# Altium PCB hotair.PcbDoc
Units mm, origin at the board's own origin, x right, y up, seen from the top; angles counter-clockwise.
Board outline 72.5 x 62 mm, 2 copper layers (Top Layer, Bottom Layer), stack 1.571 mm thick; 71 components, 50 nets, 194 pads, 2 vias.
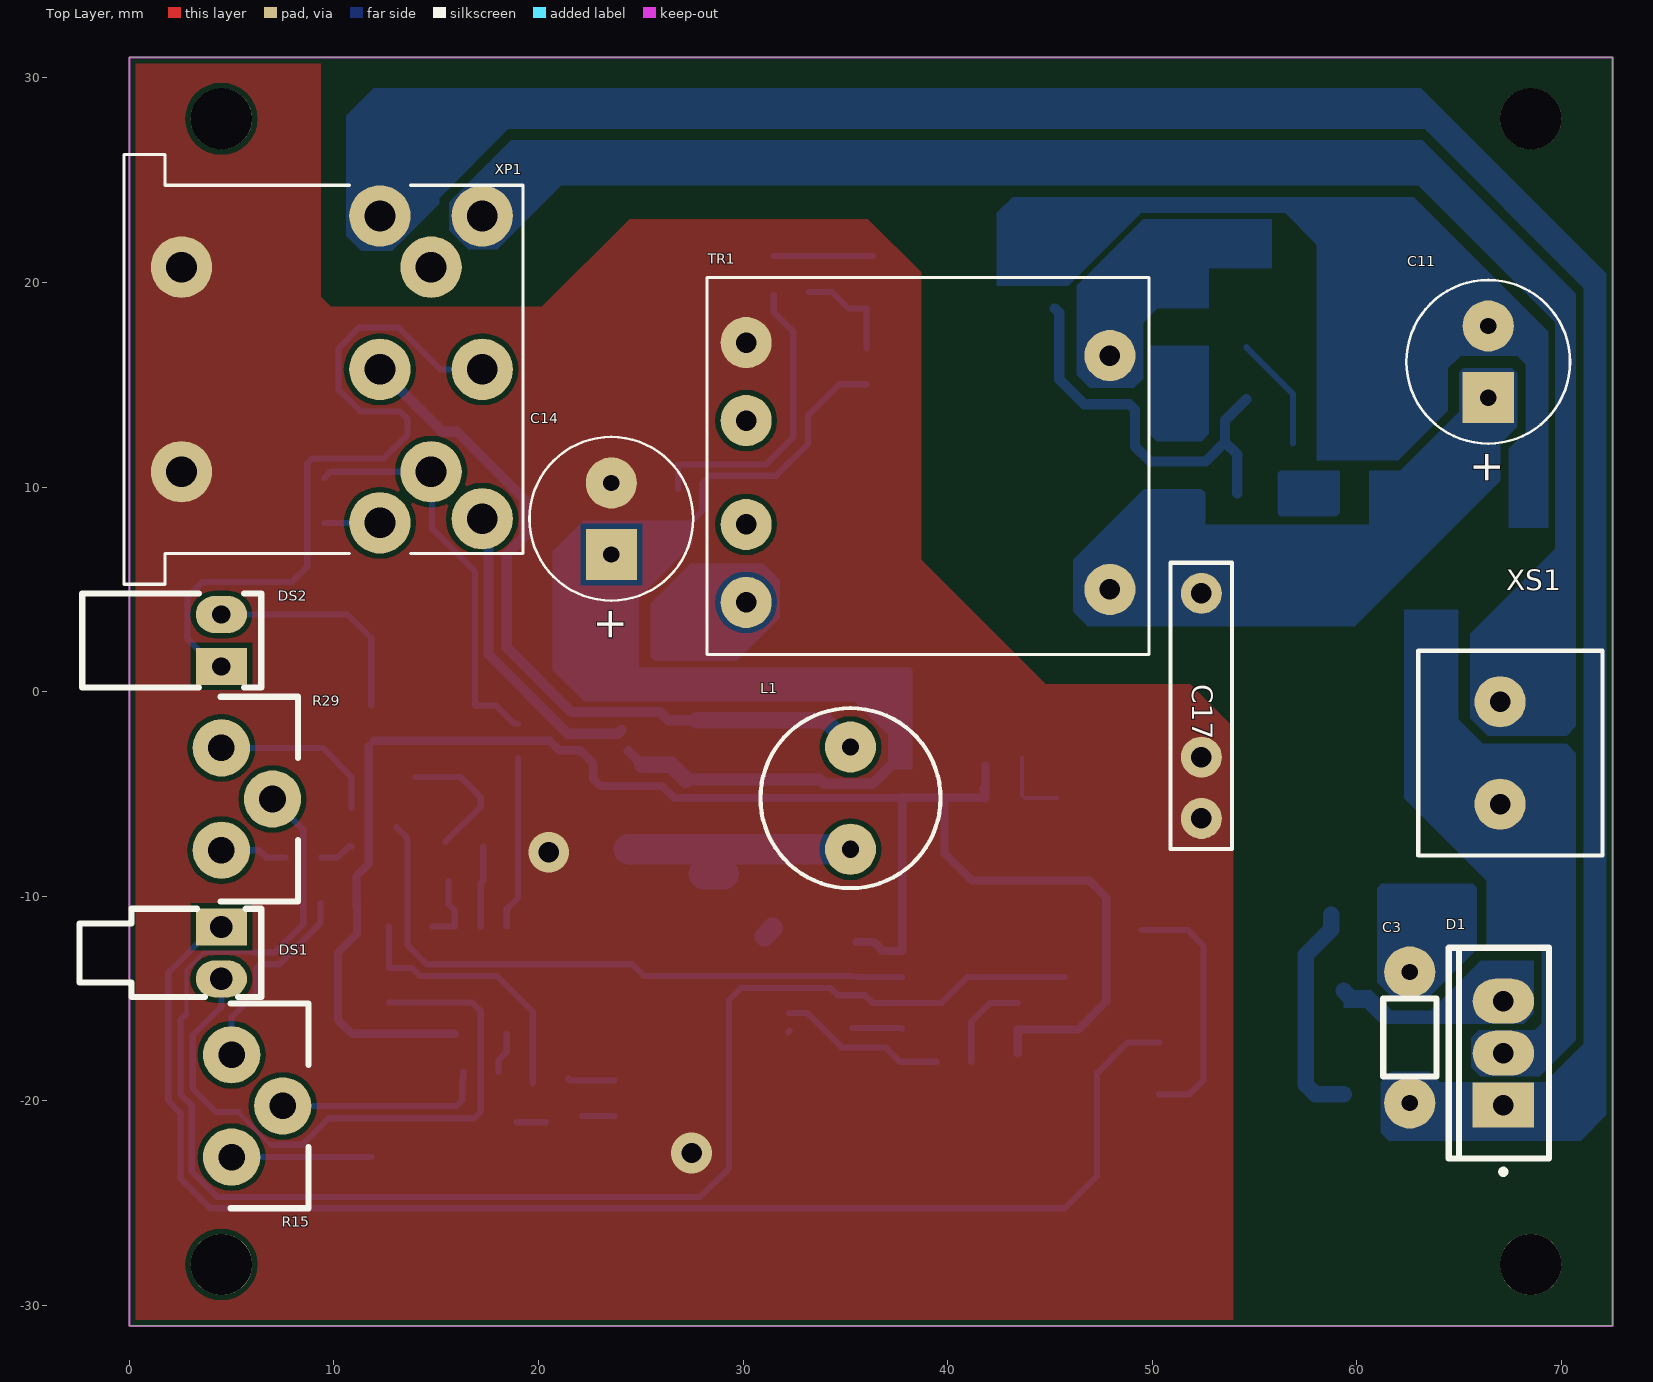
[diagram p0: Top Layer view]
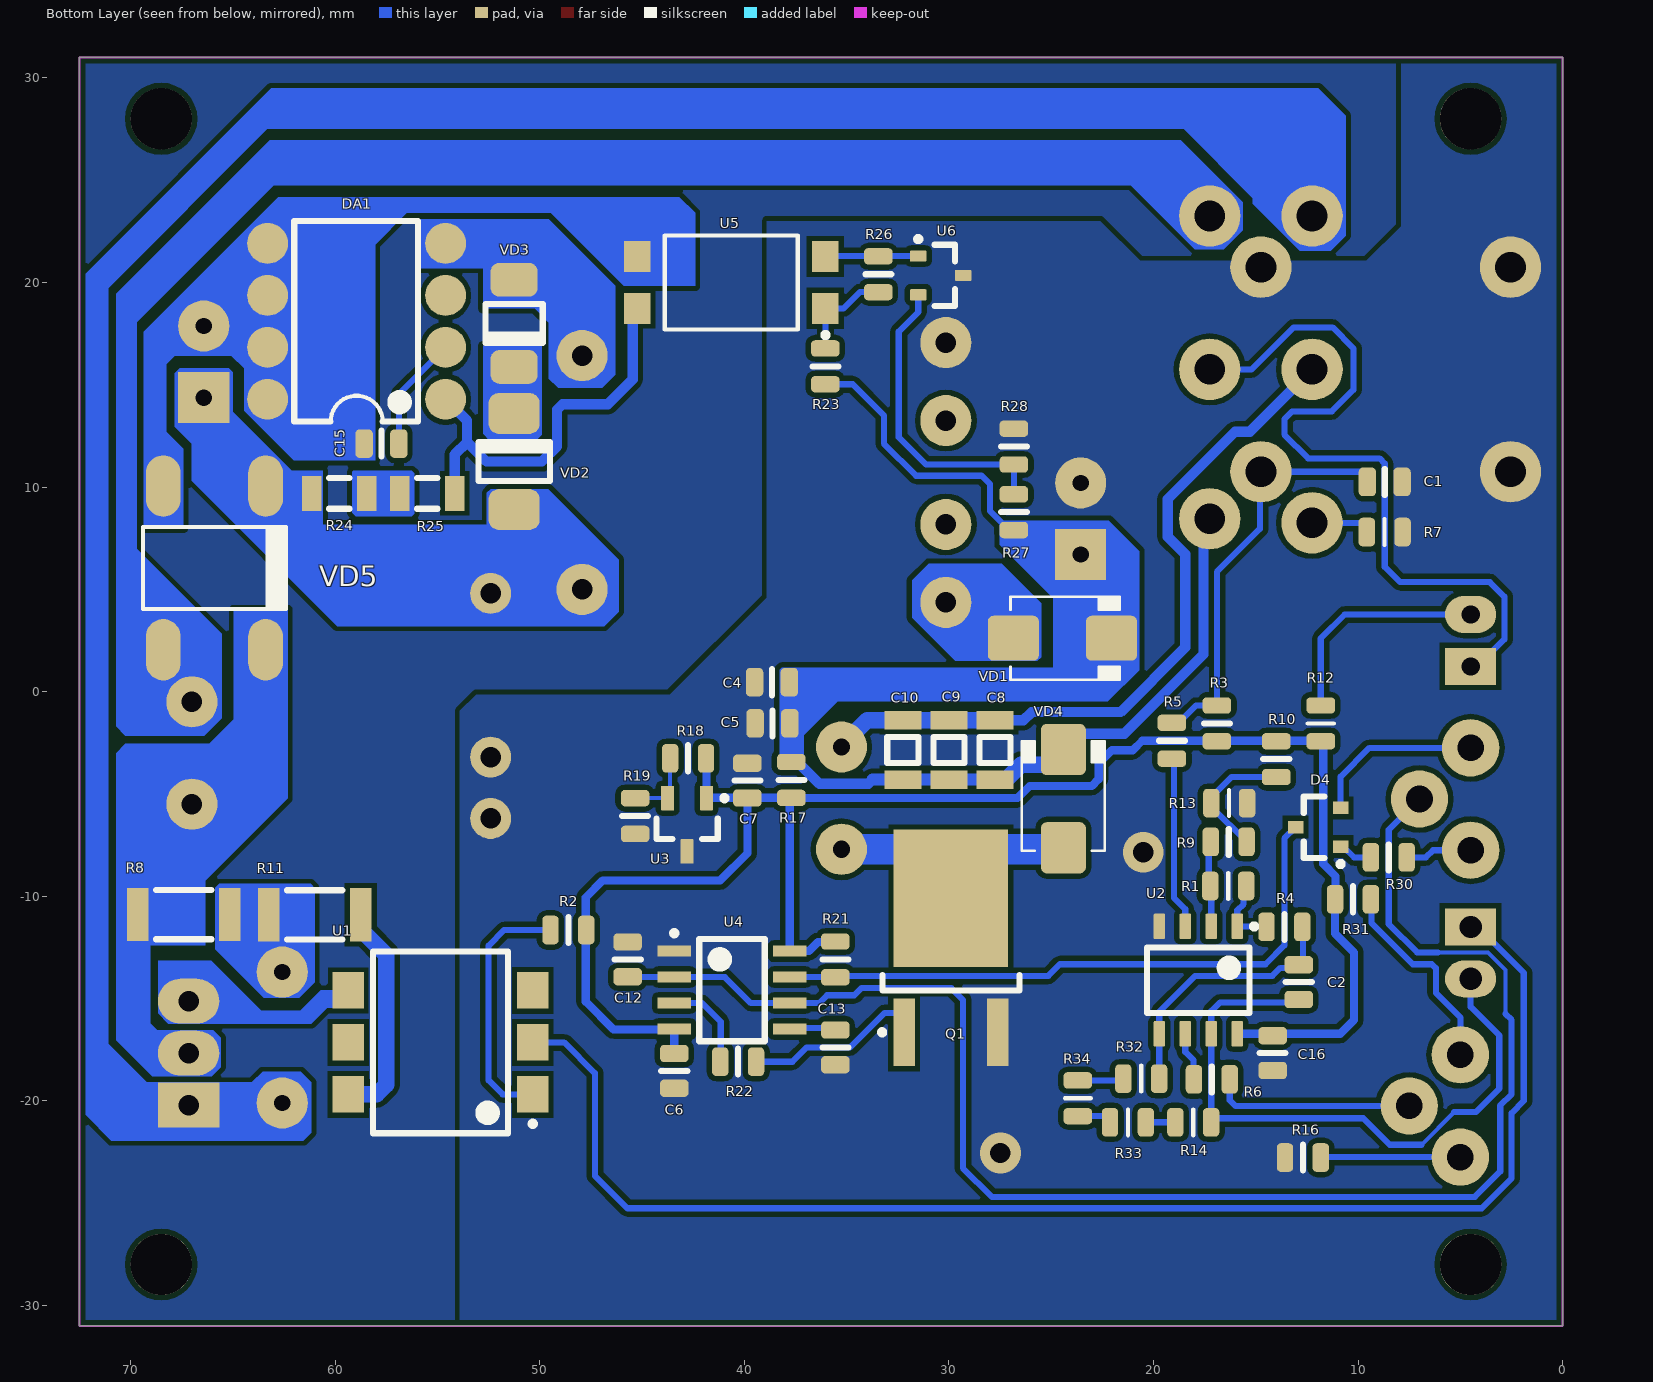
[diagram p1: Bottom Layer view, seen from below]
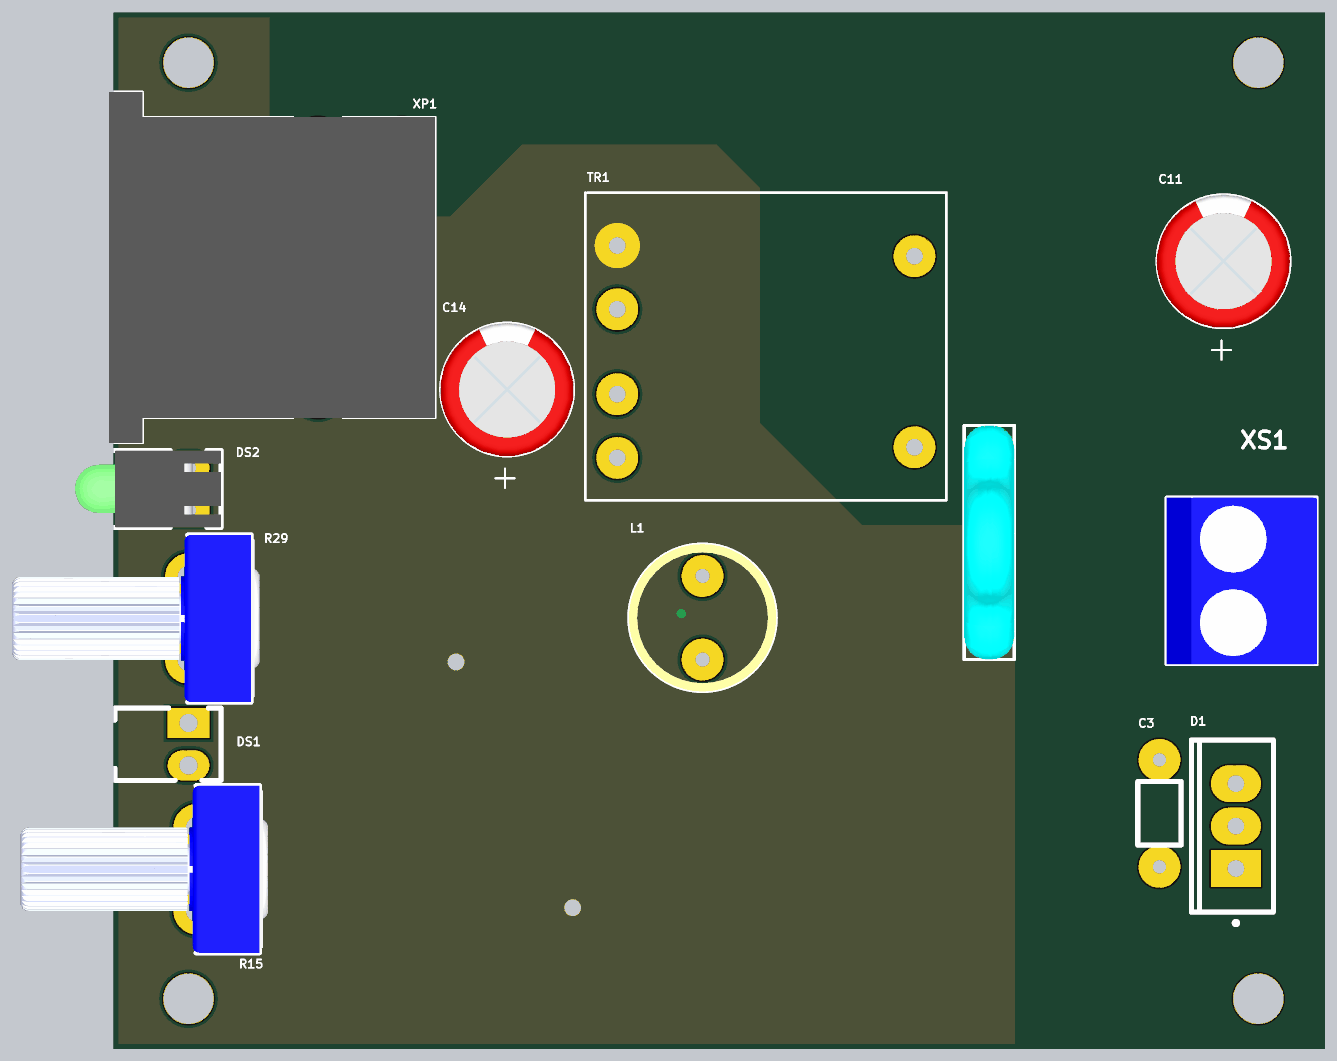
[diagram p2: 3D render of the assembled board from above, using the file's embedded part models]
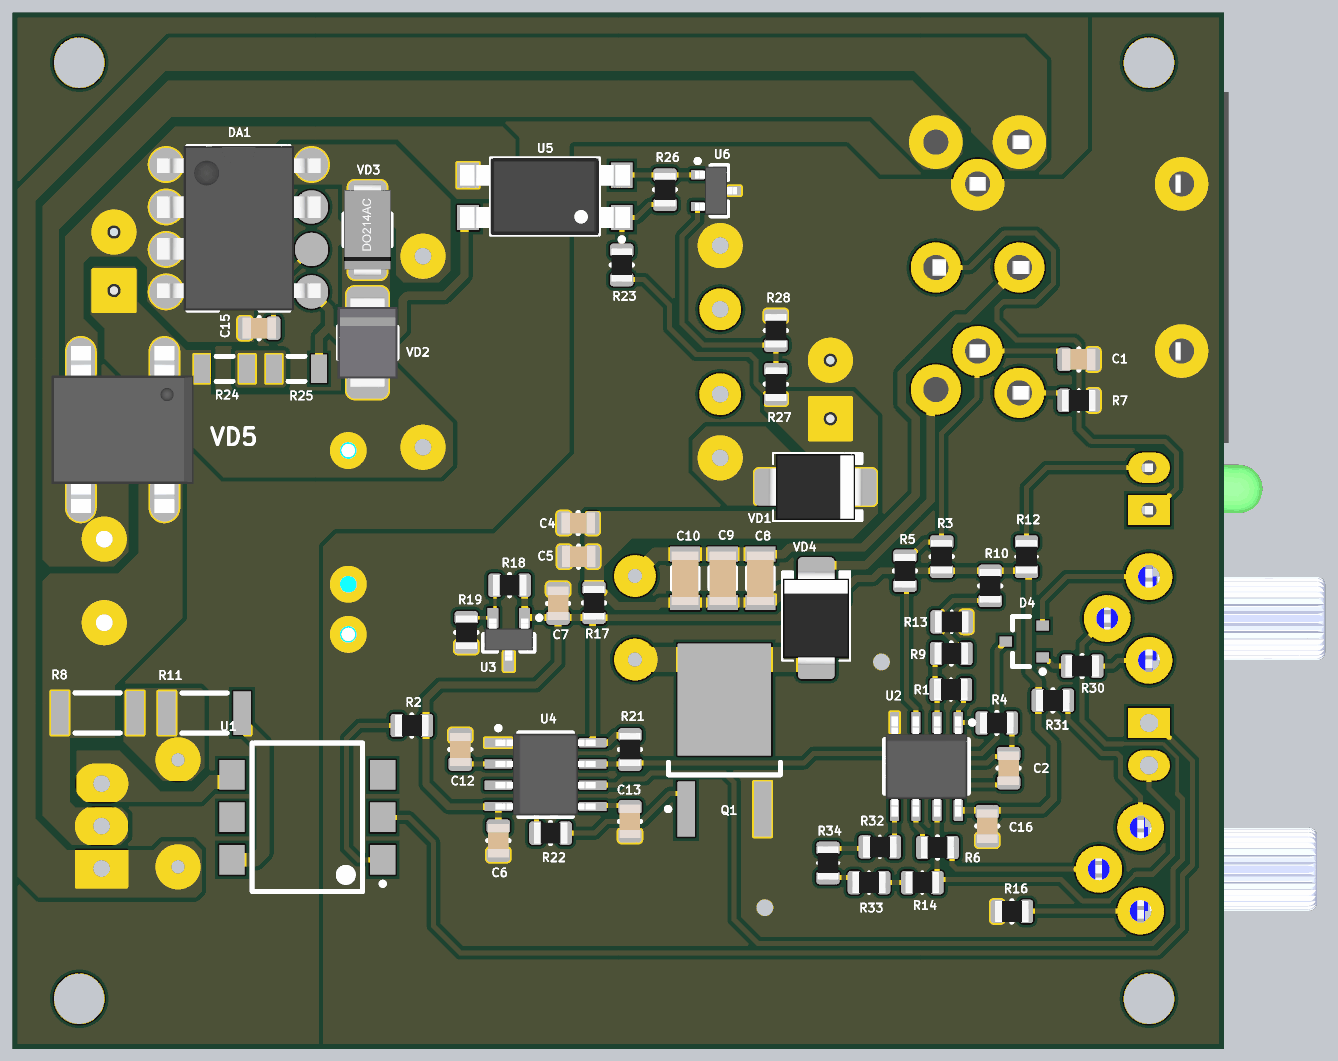
[diagram p3: 3D render of the assembled board from below, using the file's embedded part models]

## Layer stack, top to bottom
Top Solder: solder mask 0.0102, Solder Resist, Dk 3.5
Top Layer: signal copper 0.0356
Dielectric 1: dielectric 1.5, FR-4, Dk 4.8
Bottom Layer: signal copper 0.0356
Bottom Solder: solder mask 0.0102, Solder Resist, Dk 3.5

## Board outline
0,-31 0,31 72.5,31 72.5,-31

## Design rules (kind name [scope] priority, off if disabled: settings)
Clearance Clearance_1 [IsRegion] p1: gap=0.25 ignorepadtopadclearanceinfootprint=FALSE
Clearance [All] p2: gap=0.25 ignorepadtopadclearanceinfootprint=FALSE
PolygonConnect PolygonConnect_1 [IsVia] p1: connectstyle=Direct reliefconductorwidth=0.254 reliefentries=4 polygonreliefangle="90 Angle" airgapwidth=0.254
PolygonConnect [All] p2: connectstyle=Direct reliefconductorwidth=0.35 reliefentries=4 polygonreliefangle="90 Angle" airgapwidth=0.25
RoutingVias [All] p1: holewidth=0.711 width=1.27 viastyle="Through Hole" minholewidth=0.711 minwidth=1.27 maxholewidth=0.711 maxwidth=1.27
SolderMaskExpansion [All] p1: expansion=0.102
Width [All] p1: maxlimit=2 minlimit=0.2 preferedwidth=0.3
30 further rules are at their usual default settings.

## Components (designator, comment, footprint, x,y, rotation, side; value= is the part's Value field where it differs from the comment)
C1 "100nF" CAP0805R 8.7,10.25 r0 bottom
C2 "100nF" CAP0805R 12.9,-14.2 r90 bottom
C3 "A104M15X7RF5TAA" CAPA55-380X260 62.587,-16.907 r90 top
C4 "10uF" CAP0805R 38.649,0.461 r180 bottom
C5 "10uF" CAP0805R 38.624,-1.55 r180 bottom
C6 "10uF" CAP0805R 43.424,-18.538 r90 bottom
C7 "10uF" CAP0805R 39.85,-4.35 r270 bottom
C8 "10uF" CAP1206R 27.747,-2.85 r270 bottom
C9 "10uF" CAP1206R 30,-2.85 r270 bottom
C10 "10uF" CAP1206R 32.25,-2.854 r270 bottom
C11 "400 Vdc, 4.7 uF" WCAP-ATG8_8x11.5x3.5 66.42,16.12 r270 top value="4.7 uF"
C12 "220pF" CAP0805R 45.7,-13.088 r90 bottom
C13 "10nF" CAP0805R 35.55,-17.388 r270 bottom
C14 "10 Vdc, 560 uF" WCAP-ATG8_8x11.5x3.5 23.56,8.45 r270 top value="560 uF"
C15 "100nF" CAP0805R 57.734,12.12 r180 bottom
C16 "10uF" CAP0805R 14.175,-17.668 r90 bottom
C17 "Y Capacitor" CAP_Y 52.4,-0.7 r90 top value=2.2n
D1 "BTB12-600CW3G" ONSC-TO-220-3-221A-07 67.159,-17.669 r180 top
D4 "BAV99" INF-SOT23_L 11.955,-6.629 r0 bottom
DA1 "TNY279GN" SMDIP8 58.95,18.1 r0 bottom
DS1 "551-1307F" DIAL-LED-551-2_V 4.5,-12.77 r270 top
DS2 "WP934CB/GD" KING-WP934CBGD_V 4.5,2.5 r90 top
L1 "RFB0807-470L" COIL-RFB0807-2_V 35.25,-5.206 r90 top
Q1 "IRFR3708PBF" INTR-TO-252AA-3_M 29.9,-12.5 r90 bottom
R1 "499K" RES0805R 16.347,-9.5 r0 bottom value=499k
R2 "1K" RES0805R 48.6,-11.65 r0 bottom value=1k
R3 "68K" RES0805R 16.9,-1.55 r270 bottom value=68k
R4 "100K" RES0805R 13.6,-11.5 r0 bottom value=100k
R5 "2K2" RES0805R 19.1,-2.4 r90 bottom value=2k2
R6 "100K" RES0805R 17.15,-18.95 r0 bottom value=100k
R7 "51" RES0805R 8.7,7.8 r180 bottom
R8 "360R" RESC2010(5025)_L 67.4,-10.9 r0 bottom value="360.00 Ohm"
R9 "2K2" RES0805R 16.325,-7.342 r0 bottom value=2k2
R10 "68k" RES0805R 14,-3.3 r90 bottom
R11 "360R" RESC2010(5025)_L 61,-10.907 r0 bottom value="360.00 Ohm"
R12 "10K" RES0805R 11.825,-1.55 r270 bottom value=10k
R13 "51" RES0805R 16.3,-5.45 r0 bottom
R14 "1M" RES0805R 18.059,-21.05 r180 bottom
R15 "100k" CA9MH 6.25,-20.25 r270 top
R16 "2K2" RES0805R 12.7,-22.773 r180 bottom value=2k2
R17 "510" RES0805R 37.7,-4.315 r270 bottom
R18 "22K" RES0805R 42.75,-3.257 r180 bottom value=22k
R19 "10K" RES0805R 45.339,-6.08 r90 bottom value=10k
R21 "91K" RES0805R 35.55,-13.088 r90 bottom value=91k
R22 "100" RES0805R 40.3,-18.088 r180 bottom
R23 "1k" RES0805R 36.039,15.9 r90 bottom
R24 "2M" RESC1206(3216)_L 59.8,9.688 r180 bottom value="2000000.00 Ohm"
R25 "2M" RESC1206(3216)_L 55.5,9.688 r180 bottom value="2000000.00 Ohm"
R26 "1K" RES0805R 33.45,20.4 r270 bottom value=1k
R27 "22K" RES0805R 26.823,8.771 r270 bottom value=22k
R28 "3K3" RES0805R 26.823,11.976 r270 bottom value=3k3
R29 "100k" CA9MH 5.75,-5.25 r270 top
R30 "10K" RES0805R 8.5,-8.1 r180 bottom value=10k
R31 "6k2" RES0805R 10.25,-10.15 r0 bottom
R32 "1M" RES0805R 20.6,-18.917 r180 bottom
R33 "1M" RES0805R 21.25,-21.05 r0 bottom
R34 "1M" RES0805R 23.7,-19.877 r90 bottom
TR1 "V50110" V50110 47.93,4.995 r180 top
U1 "MOC3063SM" "FAIR-MDIP 6L-N06C_V" 54.85,-17.143 r0 bottom
U2 "LM358DR" D0008A_L 17.811,-14.101 r270 bottom
U3 "TL431AQDBZRQ1" DBZ0003A_M 42.8,-6.507 r270 bottom
U4 "NE555DR" D0008A_M 40.6,-14.588 r180 bottom
U5 "FOD817DSD" FAIR-MDIP-4_V 40.639,20 r0 bottom
U6 "TL431ACDBZR" DBZ0003A_L 30.4,20.342 r180 bottom
VD1 "10BQ100" DO-214AA 24.45,2.61 r180 bottom
VD2 "SM6T200CA" SMB 51.25,11.25 r270 bottom
VD3 "US1M" SMA 51.25,18 r90 bottom
VD4 "10BQ100" DO-214AA 24.407,-5.232 r90 bottom
VD5 "DF10S" DF-S 65.9,6.048 r270 bottom
XP1 "KDJ01-8" KDJ01-8 -0.25,15.75 r90 top
XS1 "DG306-021-12" DG306 67,-3 r270 top

## Footprints (in the part's own frame and the unit in brackets; to place one, negate y for a bottom-side part, rotate by r counter-clockwise, add the part's x,y. Pads: shape width x height; smd on the part's side, far side on the other; paste and mask are expansions set on the pad)
CA9MH [mm]
  round 2.8 hole 1.3: 1(-2.5,-1.25) 2(0,1.25) 3(2.5,-1.25)
  silkscreen extent -5,-1.3 5,2.5, body extent -5,-11.8 5,3, height 11.82
CAP0805R [mm] "capacitor 0805 reflow soldering"
  rrect50% 0.85x1.4 smd: 1(-0.85,0) 2(0.85,0)
  silkscreen extent 0,-0.64 0,0.64, body extent -1,-0.62 1,0.63, height 0.61
CAP1206R [mm] "capacitor 1206 reflow soldering"
  rect 0.9x1.8 smd: 1(-1.45,0) 2(1.45,0)
  silkscreen extent -0.64,-0.76 0.64,0.76, body extent -1.6,-0.8 1.6,0.8, height 0.79
CAP_Y [mm]
  round 2 hole 1 unplated: 1(-5.5,0) 2(5.5,0)
  silkscreen extent -7,-1.5 7,1.5, body extent -7,-1.5 7,1.5, height 9.5
CAPA55-380X260 [mm] "THD, 2-Leads, Dia 2.6mm, Body Length 3.8mm"
  round 2.5 hole 0.8: 1(-3.2,0) 2(3.2,0)
  silkscreen extent -1.9,-1.3 1.9,1.3, body extent -1.9,-1.3 1.9,1.3, height 2.6
COIL-RFB0807-2_V [mm] "Radial Leaded, 2-Leads, Dia 8.8mm, Height 7.5mm, Pin Spacing 5mm"
  round 2.5 hole 0.85: 1(-2.5,0) 2(2.5,0)
  silkscreen extent -4.4,-4.4 4.4,4.4, body extent -4.41,-4.41 4.41,4.41, height 7.5
D0008A_L [mm] "SOIC, 8-Leads, Body 5x4mm, Pitch 1.27mm, IPC High Density"
  rrect18% 1.25x0.55 smd: 1(-2.625,1.905) 2(-2.625,0.635) 3(-2.625,-0.635) 4(-2.625,-1.905) 5(2.625,-1.905) 6(2.625,-0.635) 7(2.625,0.635) 8(2.625,1.905)
  silkscreen extent -2.75,-2.5 1.6,2.85, body extent -3,-2.45 3,2.45, height 1.63
D0008A_M [mm] "SOIC, 8-Leads, Body 5x4mm, Pitch 1.27mm, IPC Low Density"
  rrect15% 1.65x0.55 smd: 1(-2.825,1.905) 2(-2.825,0.635) 3(-2.825,-0.635) 4(-2.825,-1.905) 5(2.825,-1.905) 6(2.825,-0.635) 7(2.825,0.635) 8(2.825,1.905)
  silkscreen extent -2.95,-2.5 1.6,2.9, body extent -3,-2.45 3,2.45, height 1.63
DBZ0003A_L [mm] "SOT23, 3-Leads, Body 3.04x1.4mm, Pitch 0.95mm, IPC High Density"
  rrect18% 0.8x0.55 smd: 1(-1.1,0.95) 2(-1.1,-0.95) 3(1.1,0)
  silkscreen extent -1.23,-1.5 0.7,1.9, body extent -1.26,-1.46 1.26,1.46, height 0.96
DBZ0003A_M [mm] "SOT23, 3-Leads, Body 3.04x1.4mm, Pitch 0.95mm, IPC Low Density"
  rrect15% 1.2x0.65 smd: 1(-1.3,0.95) 2(-1.3,-0.95) 3(1.3,0)
  silkscreen extent -1.42,-1.5 0.7,1.95, body extent -1.26,-1.46 1.26,1.46, height 0.96
DF-S [mm]
  oval 3x1.7 smd: 1(-4,2.5) 2(-4,-2.5) 3(4,-2.5) 4(4,2.5)
  silkscreen extent -2,-3.5 2,3.5, body extent -5,-4.25 5,4.25, height 3.65
DG306 [mm]
  round 2.5 hole 1 unplated: 1(-2.5,0) 2(2.5,0)
  silkscreen extent -5,-4 5,5, body extent -5,-4 5,5, height 12.62
DIAL-LED-551-2_V [mm] "LED, 2-Leads, Body 8.89x4.32mm, Pitch 2.54mm"
  rect 1.8x2.5 hole 1.09: 1(-1.27,0)
  oval 1.8x2.5 hole 1.09: 2(1.27,0)
  silkscreen extent -2.16,-6.94 2.16,1.95, body extent -2.16,-6.94 2.16,1.95, height 7.11
DO-214AA [mm] "JEDEC DO214 variation AA. SMB"
  round 0.508 on Mech15: 0(0,0)
  rrect25% 2.5x2.2 smd: A(-2.4,0) K(2.4,0)
  silkscreen extent -2.54,-2.03 2.79,2.03, body extent -2.8,-1.97 2.8,1.98, height 2.62
"FAIR-MDIP 6L-N06C_V" [mm] "SOP, 6-Leads, Body 8.51x6.35mm, Pitch 2.54mm"
  rect 1.52x1.78 smd: 1(-4.51,2.54) 2(-4.51,0) 3(-4.51,-2.54) 4(4.51,-2.54) 5(4.51,0) 6(4.51,2.54)
  silkscreen extent -4.63,-4.44 3.3,4.45, body extent -3.17,-4.26 3.17,4.26, height 5.08
FAIR-MDIP-4_V [mm] "SMD, 4-Leads, Body 6.5x4.6mm, Pitch 2.54mm"
  rect 1.3x1.5 smd: 1(-4.6,1.27) 2(-4.6,-1.27) 3(4.6,-1.27) 4(4.6,1.27)
  silkscreen extent -4.72,-2.3 3.25,2.69, body extent -5.08,-2.3 5.08,2.3, height 3.85
INF-SOT23_L [mm] "SOT23, 3-Leads, Body 2.9x1.3 mm, Pitch 0.95 mm, IPC High Density"
  rect 0.75x0.6 smd: 1(-1.1,0.95) 2(-1.1,-0.95) 3(1.1,0)
  silkscreen extent -1.22,-1.5 0.7,1.92, body extent -0.7,-1.5 0.7,1.5, height 1.1
INTR-TO-252AA-3_M [mm] "DPAK, 3-Leads, Body 6.75x6.22mm, Pitch 2.29mm, IPC Low Density"
  rect 3.3x1.05 smd: 1(-4.15,2.29) 3(-4.15,-2.29)
  rect 6.7x5.6 smd: 4(2.4,0)
  silkscreen extent -4.27,-3.35 -1.35,3.49, body extent -2.1,-3.37 4.12,3.37, height 2.39
KDJ01-8 [mm]
  round 3 hole 1.5: 1(-7.3,-17.5) 2(-7.5,-12.5) 3(-5,-15) 4(0,-12.5) 5(5,-15) 6(7.5,-12.5) 7(7.5,-17.5) 8(0,-17.5) 9(-5,-2.8) 10(5,-2.8)
  silkscreen extent -10.5,-19.5 10.5,0, body extent -10.5,-19.5 10.5,0, height 19.51
KING-WP934CBGD_V [mm] "THD, 2-Leads, Body 4.6x8.75mm"
  rect 1.8x2.5 hole 0.9: 1(-1.27,0)
  oval 1.8x2.5 hole 0.9: 2(1.27,0)
  silkscreen extent -2.3,-1.95 2.3,6.8, body extent -2.3,-1.95 2.3,6.8, height 7.3
ONSC-TO-220-3-221A-07 [mm] "FM, 3-Leads, Body 10.3x4.85mm, Pitch 2.54mm"
  rect 3x2.2 hole 1: 1(0,2.54)
  oval 3x2.2 hole 1: 2(0,0) 3(0,-2.54)
  silkscreen extent -2.23,-5.15 2.67,5.92, body extent -2.21,-5.15 2.64,5.15, height 19.68
RES0805R [mm] "resistor 0805 reflow soldering"
  rrect50% 0.8x1.4 smd: 1(-0.875,0) 2(0.875,0)
  silkscreen extent 0,-0.64 0,0.64, body extent -1,-0.62 1,0.63, height 0.61
RESC1206(3216)_L [mm] "Chip Resistor, Body 3.2x1.6mm, IPC High Density"
  rect 0.95x1.7 smd: 1(-1.35,0) 2(1.35,0)
  silkscreen extent -0.5,-0.75 0.5,0.75, body extent -1.67,-0.87 1.67,0.87, height 0.75
RESC2010(5025)_L [mm] "Chip Resistor, Body 5.0x2.5mm, IPC High Density"
  rect 1.05x2.6 smd: 1(-2.25,0) 2(2.25,0)
  silkscreen extent -1.35,-1.2 1.35,1.2, body extent -2.6,-1.35 2.6,1.35, height 0.71
SMA [mm]
  rrect50% 1.65x2.3 smd: A(2.13,0) K(-2.13,0)
  silkscreen extent -0.95,-1.4 0.95,1.4, body extent -2.74,-1.4 2.74,1.4, height 2.3
SMB [mm]
  rrect50% 2x2.5 smd: A(2.35,0) K(-2.35,0)
  silkscreen extent -0.95,-1.75 0.95,1.75, body extent -2.7,-1.8 2.7,1.8, height 2.32
SMDIP8 [mm]
  round 2 smd: 1(-4.35,3.81) 2(-4.35,1.27) 3(-4.35,-1.27) 4(-4.35,-3.81) 5(4.35,-3.81) 6(4.35,-1.27) 7(4.35,1.27) 8(4.35,3.81)
  silkscreen extent -3,-4.9 3.05,4.91, body extent -4.9,-4.93 4.9,4.92, height 4.02
V50110 [mm]
  round 2.5 hole 1: 1(0,0) 4(0,-11.43) 5(17.78,-12.065) 6(17.78,-8.255) 7(17.78,-3.175) 8(17.78,0.635)
  silkscreen extent -1.91,-15.24 19.69,3.18
WCAP-ATG8_8x11.5x3.5 [mm] "Aluminum Electrolytic Capacitors, 8x11.5mm"
  rect 2.5x2.5 hole 0.8: 1(1.75,0)
  round 2.5 hole 0.8: 2(-1.75,0)
  silkscreen extent -4,-4 4,4, body extent -3.99,-4 4,4, height 11.81

## Part data
C1 C2 C15: library part CC0805_100NF_50V_10%_X7R, Case=0805, Manufacturer=GENERIC, Manufacturer1 ComponentHeight=1.35mm, Manufacturer1 Example=EPCOS, Manufacturer1 Part Number=B37941K5104K62, Manufacturer Part Number 2=CC0805KPX7R9BB104, Tolerance=±10%, Voltage=50V, Author="I. Kuznetsov", Component Type=Standard, CreateDate=03.12.2007, HelpURL=\\cern.ch\dfs\Applications\Altium\Datasheets\CC0805_X7R_EPCOS.pdf, LatestRevisionDate=03.12.2007, Manufacturer Part Number=CC0805_100NF_50V_10%_X7R, Mounted=Yes, Part Description="SMD Multilayer Chip Ceramic Capacitor", Part Number=CC0805_100NF_50V_10%_X7R, Pin Count=2, SMD=Yes, Socket=No, Status=Preferred, Table="Capacitors SMD", TC=X7R
C3: library part CMP-2000-05716-1, "Axial Leaded Multilayer Ceramic Capacitor for General Purpose, 50 VDC, 100 nF, +/- 20%, -55 to 125 degC, 2-Pin THD, RoHS, Tape and Reel", Capacitance=0.1µF, Manufacturer=Vishay, Operating Temperature=-55°C~125°C, Package / Case=Axial, Package Description="2-Pin Axial Lead, Dia 2.6 mm, Body Length 3.8 mm", Package Reference=CAPA55-380X260, Ratings=-, Standard Package=7,000, Temperature Coefficient=X7R, Tolerance=±20%, Voltage - Rated=50V, Applications=GeneralPurpose, Category=Capacitors, Datasheet URL=http://www.vishay.com/docs/45164/aseries.pdf, Datasheet Version=08/2013, Family=CeramicCapacitors, Features=-, Height - Seated (Max)=-, Lead Spacing=-, Lead Style=-, Manufacturer URL=http://www.vishay.com/, Mounting Technology=ThroughHole, Mounting Type=ThroughHole, Packaging=Tape&Reel(TR), Series=A, Size / Dimension="0.098\"Diax0.150\"L(2.50mmx3.80mm)", Thickness (Max)=-
C4 C5 C6 C7 C16: library part CC0805_10UF_25V_10%_X5R, Case=0805, Manufacturer=GENERIC, Manufacturer1 ComponentHeight=1.4mm, Manufacturer1 Example=TDK, Manufacturer1 Part Number=C2012X5R1E106K125AB, Manufacturer Part Number 2=CC0805KKX5R8BB106, Tolerance=±10%, Voltage=25V, Author="I. Kuznetsov", Component Type=Standard, CreateDate=25.10.2012, HelpURL=\\cern.ch\dfs\Applications\Altium\Datasheets\CC0805_X5R_TDK_C.pdf, LatestRevisionDate=25.10.2012, Manufacturer Part Number=CC0805_10UF_25V_10%_X5R, Mounted=Yes, Part Description="SMD Multilayer Chip Ceramic Capacitor", Part Number=CC0805_10UF_25V_10%_X5R, Pin Count=2, SMD=Yes, Socket=No, Status=Preferred, Table="Capacitors SMD", TC=X5R
C8 C9 C10: library part CC1206_10UF_10V_10%_X7R, Case=1206, Manufacturer=GENERIC, Manufacturer1 ComponentHeight=1.8mm, Manufacturer1 Example=KEMET, Manufacturer1 Part Number=C1206C106K8RAC, Manufacturer Part Number=CC1206_10uF_10V_10%_X7R, Manufacturer Part Number 2=CC1206KKX7R6BB106, Tolerance=±10%, Voltage=10V, Author="I. Kuznetsov", Component Type=Standard, CreateDate=03.12.2007, HelpURL=\\cern.ch\dfs\Applications\Altium\Datasheets\CC1206_X7R_KEMET.pdf, LatestRevisionDate=03.12.2007, Mounted=Yes, Part Description="SMD Multilayer Chip Ceramic Capacitor", Part Number=CC1206_10UF_10V_10%_X7R, Pin Count=2, SMD=Yes, Socket=No, Status=Preferred, Table="Capacitors SMD", TC=X7R
C11: library part 860011374005, "WCAP-ATG8 Aluminum Electrolytic Capacitors, 8x11.5mm, 400 Vdc, 4.7 uF", Operating Temperature="-25 °C up to +85 °C", Rated Voltage="400 Vdc", ComponentLink1Description=Manufacturer, ComponentLink1URL=http://www.we-online.de, ComponentLink2Description=Datasheet, ComponentLink2URL=http://katalog.we-online.de/pbs/datasheet/860011374005.pdf, Life Cycle=2000h, Part Number=860011374005, Published Date="Sep. 2017", Publisher="Wurth Elektronik", Size=8x11.5mm
C12: library part CC0805_220PF_50V_5%_NP0, Case=0805, Manufacturer=GENERIC, Manufacturer1 ComponentHeight=1.30mm, Manufacturer1 Example=EPCOS, Manufacturer1 Part Number=B37940K5221J060, Manufacturer Part Number 2=CC0805JRNPO9BN221, Tolerance=±5%, Voltage=50V, Author="I. Kuznetsov", Component Type=Standard, CreateDate=03.12.2007, HelpURL=\\cern.ch\dfs\Applications\Altium\Datasheets\CC0805_NP0_EPCOS.pdf, LatestRevisionDate=03.12.2007, Manufacturer Part Number=CC0805_220PF_50V_5%_NP0, Mounted=Yes, Part Description="SMD Multilayer Chip Ceramic Capacitor", Part Number=CC0805_220PF_50V_5%_NP0, Pin Count=2, SMD=Yes, Socket=No, Status=Preferred, Table="Capacitors SMD", TC=NP0
C13: library part CC0805_10NF_250V_10%_X7R, Case=0805, Manufacturer=GENERIC, Manufacturer1 ComponentHeight=0.88mm, Manufacturer1 Example=KEMET, Manufacturer1 Part Number=C0805C103KARACTU, Manufacturer Part Number 2=CC0805KKX7RYBB103, Tolerance=±10%, Voltage=250V, Author="I. Kuznetsov", Component Type=Standard, CreateDate=24.06.2013, HelpURL=\\cern.ch\dfs\Applications\Altium\Datasheets\CC0805_X7R_KEMET.pdf, LatestRevisionDate=24.06.2013, Manufacturer Part Number=CC0805_10NF_250V_10%_X7R, Mounted=Yes, Part Description="SMD Multilayer Chip Ceramic Capacitor", Part Number=CC0805_10NF_250V_10%_X7R, Pin Count=2, SMD=Yes, Socket=No, Status=None, Table="Capacitors SMD", TC=X7R
C14: library part 860010274012, "WCAP-ATG8 Aluminum Electrolytic Capacitors, 8x11.5mm, 10 Vdc, 560 uF", Operating Temperature="-40 °C up to +85 °C", Rated Voltage="10 Vdc", ComponentLink1Description=Manufacturer, ComponentLink1URL=http://www.we-online.de, ComponentLink2Description=Datasheet, ComponentLink2URL=http://katalog.we-online.de/pbs/datasheet/860010274012.pdf, Life Cycle=2000h, Part Number=860010274012, Published Date="Sep. 2017", Publisher="Wurth Elektronik", Size=8x11.5mm
C17: library part CAP_Y, PartNumber="Y Film Capacitor", Voltage=1000V
D1: library part CMP-1070-00036-1, "Triacs, Silicon Bidirectional Thyristor, 3-Pin TO-220, Pb-Free, Tube", Manufacturer="On Semiconductor", ComponentLink1Description="Manufacturer URL", ComponentLink1URL=http://www.onsemi.com/, ComponentLink2Description=Datasheet, ComponentLink2URL=http://www.onsemi.com/pub_link/Collateral/BTB12-600CW3-D.PDF, ComponentLink3Description="Package Specification", ComponentLink3URL=http://www.onsemi.com/pub_link/Collateral/221A-07.PDF, DatasheetVersion="Rev. 1", IGT Max (mA)=35, IT(RMS) Max (A)=12, ITSM Max (A)=120, Mounting Technology="Through Hole", PackageDescription="3-Pin Flange Mount, Vertical Straight Lead, Body 9.97 x 4.445 mm, Pitch 2.54 mm", PackageReference=TO-220-3-221A-07, PackageVersion="Rev. O, 07/2008", Packing=Tube, PartNumber=BTB12-600CW3G, RoHS=Pb-Free
D4: library part CMP-1176-00014-1, "Silicon Switching Diode, SOT23, Reel, Green", Manufacturer=Infineon, ComponentLink1Description="Manufacturer URL", ComponentLink1URL=http://www.infineon.com/, ComponentLink2Description=Datasheet, ComponentLink2URL=http://www.infineon.com/dgdl/bav99series.pdf?folderId=db3a30431400ef6801141b5844e103ea&fileId=db3a30431400ef6801141c1b237d042f, ComponentLink3Description="Package Specification", ComponentLink3URL=http://www.infineon.com/dgdl/smbta14_mmbta14.pdf?folderId=db3a30431441fb5d011445c30f210183&fileId=db3a30431441fb5d011445ef0201018c, Green=TRUE, Mounting Technology="Surface Mount", PackageDescription="3-Pin Small Outline Transistor Package, 1.3 x 2.9 mm Body, 0.95 mm Pitch", PackageReference=SOT23, PackageVersion=Apr-08, Packing=Reel, PartNumber=BAV99, RevisionNote="Re-Activated Devices"
DS1: library part CMP-2000-05095-1, "3mm LED Circuit Board Indicator .200' High LED Centerline, GREEN, 1.9 V, 2 mA, 2-Pin THD, RoHS, Bulk", Emitting Color=YellowGreen, Forward Current=7mA, Forward Voltage=2.2V, Manufacturer=Dialight, Operating Temperature Classification=Industrial, Operating Temp Range=-55Cto100C, Power Dissipation=20W, Reverse Voltage=5V, Test Current (It)=2mA, Datasheet URL=http://datasheet.octopart.com/551-1307F-Dialight-datasheet-2832.pdf, Datasheet Version=Jul-02, DELETED=Compliant, High Brightness=No, Lens Dimensions=2.89x2.89x2.54mm, Lens Type=Diffused, Luminous Intensity=1.6mcd, Lum Intensity=1.6mcd, Main Category=StandardLED, Manufacturer URL=http://www.dialight.com, Mounting=ThroughHole, Number of Elements=1, Packaging=Bulk, Peak Wavelength=565nm, Pin Count=2, Product Depth (mm)=4.32mm, Product Height (mm)=7.11mm, Product Length (mm)=8.89mm, Rad Hardened=No, Shape Type=Circular, Type=Uni-Color, Viewing Angle=60deg
DS2: library part CMP-2000-07417-1, "Right Angle LED Indicator, 62.5 mW, 25 mA, -40 to 85 degC, 2-Pin THD, RoHS, Bulk", Color=Green, Current=20mA, Manufacturer=Kingbright, Millicandela Rating=22.5mcd, Package Description="2-Pin Through Hole Device, Body 4.6 x 8.75 mm", Package Reference=WP934CBGD, Standard Package=500, Voltage Rating=2.2V, 3D Model="WP934CB/x.sldprt /  / WP934CB/x.pro /  / WP934CB/x.igs /  / WP934CB/x.stp", Catalog Drawings="WP934CBSeriesFront /  / WP934CBSeriesSide", Category=Optoelectronics, Configuration=Single, Datasheet URL=http://www.kingbrightusa.com/images/catalog/SPEC/WP934CB-GD.pdf, Datasheet Version="Rev. 10B, 09/2016", Dynamic Catalog=SingleLevel3mm(T1)SingleColorRightAngleLEDs, Family=LEDs-CircuitBoardIndicators,Arrays,LightBars,BarGraphs, Lens Style/Size=RoundwithDomedTop,3mm, Lens Type=Diffused,Tinted, Manufacturer URL=http://www.kingbright.com/, Minimum Quantity=Green, Mounting Technology=ThroughHole, Mounting Type=ThroughHole,RightAngle, Other Names="754-1297 / WP934CBGD", Packaging=Bulk, Quantity Available=Bulk, Viewing Angle=40°, Wavelength - Peak=568nm
L1: library part CMP-0924-00047-1, "Power Inductor, 47 uH +/- 10%, 1.45 A, -40 to 125 degC, 2-Pin Radial Leaded, Dia 8.8 mm, RoHS, Tray", Ambient Temperature Range="-40 to 125 degC", Inductance="47 uH", Manufacturer=Coilcraft, Tolerance="+/- 10%", ComponentLink1Description="Manufacturer URL", ComponentLink1URL=http://www.coilcraft.com/, ComponentLink2Description=Datasheet, ComponentLink2URL=http://www.coilcraft.com/pdfs/rfb.pdf, DatasheetVersion=Sep-13, DCR="0.19 Ohm Max.", Irms Rise (20 degC)="1.3 A", Irms Rise (40 degC)="1.85 A", Isat="1.45 A", Mounting Technology="Through Hole", PackageDescription="2-Pin Radial Leaded, Dia 8.8 mm, Height 7.5 mm, Pin Spacing 5 mm", PackageReference=RFB0807-2, Packing=Tray, PartNumber=RFB0807-470L, RoHS=TRUE, SRF="12 MHz Typ."
Q1: library part CMP-2000-05156-1, "Mosfet N-Channel, 30 V, 61 A, -55 to 175 degC, 3-Pin DPAK, RoHS, Tube", Alternate Case Style=D-PAK, Continuous Drain Current Id=61A, Drain Source Voltage Vds=30V, Junction to Case Thermal Resistance A=1.73degC/W, Manufacturer="International Rectifier", On Resistance Rds(on)=13mohm, On State resistance @ Vgs = 10V=12.5mohm, Operating Temperature Max=175degC, Operating Temperature Min=-55degC, Operating Temperature Range=-55degCto+175degC, Package / Case=DPAK, Package Description="3-Pin Surface Mount Device, Body 6.54 x 6.095 mm, Pitch 2.29 mm", Package Reference=TO-252AA-3, Power Dissipation Pd=87W, Pulse Current Idm=244A, Rds(on) Test Voltage Vgs=10V, Threshold Voltage Vgs Typ=2V, Transistor Case Style=TO-252, Current Id Max=61A, Datasheet URL=http://www.irf.com/product-info/datasheets/data/irfr3708pbf.pdf, Datasheet Version=Dec-04, Manufacturer URL=http://internationalrectifier.com/, MSL=–, No. of Pins=3, SVHC=NoSVHC(19-Dec-2012), Transistor Polarity=NChannel, Voltage Vds Typ=30V, Voltage Vgs Max=2V, Voltage Vgs Rds on Measurement=10V
R1: library part R0805_499K_0.1%_0.125W_25PPM, Case=0805, Manufacturer=GENERIC, Manufacturer1 ComponentHeight=0.6mm, Manufacturer1 Example=PANASONIC, Manufacturer1 Part Number=ERA6AEB4993V, Power=0.125W, Tolerance=±0.1%, Author="CERN DEM JLC", Component Type=Standard, CreateDate=20.06.2011, HelpURL=\\cern.ch\dfs\Applications\Altium\Datasheets\R0805_PANASONIC_ERA.pdf, LatestRevisionDate=20.06.2011, Manufacturer Part Number=R0805_499K_0.1%_0.125W_25PPM, Mounted=Yes, PackageDescription=Standard, Part Description="Thin Film Chip Resistor", Part Number=R0805_499K_0.1%_0.125W_25PPM, Pin Count=2, SMD=Yes, Socket=No, Status="Not recommended", Table="Resistors SMD", TC=±25ppm
R2 R23 R26: library part R0805_1K_1%_0.125W_100PPM, Case=0805, Manufacturer=GENERIC, Manufacturer1 ComponentHeight=0.6mm, Manufacturer1 Example="NIC COMPONENT", Manufacturer1 Part Number=NRC10F1001TRF, Power=0.125W, Tolerance=±1%, Author="CERN DEM JLC", Component Type=Standard, CreateDate=03.12.2007, HelpURL=\\cern.ch\dfs\Applications\Altium\Datasheets\R0805_NIC_NRC.pdf, LatestRevisionDate=13.03.2008, Manufacturer Part Number=R0805_1K_1%_0.125W_100PPM, Mounted=Yes, PackageDescription=Standard, Part Description="General Purpose Thick Film Chip Resistor", Part Number=R0805_1K_1%_0.125W_100PPM, Pin Count=2, SMD=Yes, Socket=No, Status=Preferred, Table="Resistors SMD", TC=±100ppm/°C
R3 R10: library part R0805_68K_1%_0.125W_100PPM, Case=0805, Manufacturer=GENERIC, Manufacturer1 ComponentHeight=0.6mm, Manufacturer1 Example="NIC COMPONENT", Manufacturer1 Part Number=NRC10F6802TRF, Power=0.125W, Tolerance=±1%, Author="CERN DEM JLC", Component Type=Standard, CreateDate=03.12.2007, HelpURL=\\cern.ch\dfs\Applications\Altium\Datasheets\R0805_NIC_NRC.pdf, LatestRevisionDate=13.03.2008, Manufacturer Part Number=R0805_68K_1%_0.125W_100PPM, Mounted=Yes, PackageDescription=Standard, Part Description="General Purpose Thick Film Chip Resistor", Part Number=R0805_68K_1%_0.125W_100PPM, Pin Count=2, SMD=Yes, Socket=No, Status=Preferred, Table="Resistors SMD", TC=±100ppm/°C
R4 R6: library part R0805_100K_1%_0.125W_100PPM, Case=0805, Manufacturer=GENERIC, Manufacturer1 ComponentHeight=0.6mm, Manufacturer1 Example="NIC COMPONENT", Manufacturer1 Part Number=NRC10F1003TRF, Power=0.125W, Tolerance=±1%, Author="CERN DEM JLC", Component Type=Standard, CreateDate=03.12.2007, HelpURL=\\cern.ch\dfs\Applications\Altium\Datasheets\R0805_NIC_NRC.pdf, LatestRevisionDate=13.03.2008, Manufacturer Part Number=R0805_100K_1%_0.125W_100PPM, Mounted=Yes, PackageDescription=Standard, Part Description="General Purpose Thick Film Chip Resistor", Part Number=R0805_100K_1%_0.125W_100PPM, Pin Count=2, SMD=Yes, Socket=No, Status=Preferred, Table="Resistors SMD", TC=±100ppm/°C
R5 R9 R16: library part R0805_2K2_1%_0.125W_100PPM, Case=0805, Manufacturer=GENERIC, Manufacturer1 ComponentHeight=0.6mm, Manufacturer1 Example="NIC COMPONENT", Manufacturer1 Part Number=NRC10F2201TRF, Power=0.125W, Tolerance=±1%, Author="CERN DEM JLC", Component Type=Standard, CreateDate=03.12.2007, HelpURL=\\cern.ch\dfs\Applications\Altium\Datasheets\R0805_NIC_NRC.pdf, LatestRevisionDate=13.03.2008, Manufacturer Part Number=R0805_2K2_1%_0.125W_100PPM, Mounted=Yes, PackageDescription=Standard, Part Description="General Purpose Thick Film Chip Resistor", Part Number=R0805_2K2_1%_0.125W_100PPM, Pin Count=2, SMD=Yes, Socket=No, Status=Preferred, Table="Resistors SMD", TC=±100ppm/°C
R7 R13: library part R0805_51R_1%_0.125W_100PPM, Case=0805, Manufacturer=GENERIC, Manufacturer1 ComponentHeight=0.6mm, Manufacturer1 Example="NIC COMPONENT", Manufacturer1 Part Number=NRC10F51R0TRF, Power=0.125W, Tolerance=±1%, Author="CERN DEM JLC", Component Type=Standard, CreateDate=03.12.2007, HelpURL=\\cern.ch\dfs\Applications\Altium\Datasheets\R0805_NIC_NRC.pdf, LatestRevisionDate=13.03.2008, Manufacturer Part Number=R0805_51R_1%_0.125W_100PPM, Mounted=Yes, PackageDescription=Standard, Part Description="General Purpose Thick Film Chip Resistor", Part Number=R0805_51R_1%_0.125W_100PPM, Pin Count=2, SMD=Yes, Socket=No, Status=Preferred, Table="Resistors SMD", TC=±100ppm/°C
R8 R11: library part CMP-1017-00459-1, "360R 0.75W 1% 2010 (5025 Metric)  SMD", Case-EIA=2010, Case-Metric=5025, Power="0.75 W", Tolerance="1 %", Technology=SMT
R12 R19 R30: library part R0805_10K_1%_0.125W_100PPM, Case=0805, Manufacturer=GENERIC, Manufacturer1 ComponentHeight=0.6mm, Manufacturer1 Example="NIC COMPONENT", Manufacturer1 Part Number=NRC10F1002TRF, Power=0.125W, Tolerance=±1%, Author="CERN DEM JLC", Component Type=Standard, CreateDate=03.12.2007, HelpURL=\\cern.ch\dfs\Applications\Altium\Datasheets\R0805_NIC_NRC.pdf, LatestRevisionDate=13.03.2008, Manufacturer Part Number=R0805_10K_1%_0.125W_100PPM, Mounted=Yes, PackageDescription=Standard, Part Description="General Purpose Thick Film Chip Resistor", Part Number=R0805_10K_1%_0.125W_100PPM, Pin Count=2, SMD=Yes, Socket=No, Status=Preferred, Table="Resistors SMD", TC=±100ppm/°C
R14 R32 R33 R34: library part R0805_1M_1%_0.125W_100PPM, Case=0805, Manufacturer=GENERIC, Manufacturer1 ComponentHeight=0.6mm, Manufacturer1 Example="NIC COMPONENT", Manufacturer1 Part Number=NRC10F1004TRF, Power=0.125W, Tolerance=±1%, Author="CERN DEM JLC", Component Type=Standard, CreateDate=03.12.2007, HelpURL=\\cern.ch\dfs\Applications\Altium\Datasheets\R0805_NIC_NRC.pdf, LatestRevisionDate=13.03.2008, Manufacturer Part Number=R0805_1M_1%_0.125W_100PPM, Mounted=Yes, PackageDescription=Standard, Part Description="General Purpose Thick Film Chip Resistor", Part Number=R0805_1M_1%_0.125W_100PPM, Pin Count=2, SMD=Yes, Socket=No, Status=Preferred, Table="Resistors SMD", TC=±100ppm/°C
R15 R29: library part CA9MH, Component Type=Standard, Part Number=CA9MH, Pin Count=3
R17: library part R0805_510R_1%_0.125W_100PPM, Case=0805, Manufacturer=GENERIC, Manufacturer1 ComponentHeight=0.6mm, Manufacturer1 Example="NIC COMPONENT", Manufacturer1 Part Number=NRC10F5100TRF, Power=0.125W, Tolerance=±1%, Author="CERN DEM JLC", Component Type=Standard, CreateDate=03.12.2007, HelpURL=\\cern.ch\dfs\Applications\Altium\Datasheets\R0805_NIC_NRC.pdf, LatestRevisionDate=13.03.2008, Manufacturer Part Number=R0805_510R_1%_0.125W_100PPM, Mounted=Yes, PackageDescription=Standard, Part Description="General Purpose Thick Film Chip Resistor", Part Number=R0805_510R_1%_0.125W_100PPM, Pin Count=2, SMD=Yes, Socket=No, Status=Preferred, Table="Resistors SMD", TC=±100ppm/°C
R18 R27: library part R0805_22K_1%_0.125W_100PPM, Case=0805, Manufacturer=GENERIC, Manufacturer1 ComponentHeight=0.6mm, Manufacturer1 Example="NIC COMPONENT", Manufacturer1 Part Number=NRC10F2202TRF, Power=0.125W, Tolerance=±1%, Author="CERN DEM JLC", Component Type=Standard, CreateDate=03.12.2007, HelpURL=\\cern.ch\dfs\Applications\Altium\Datasheets\R0805_NIC_NRC.pdf, LatestRevisionDate=13.03.2008, Manufacturer Part Number=R0805_22K_1%_0.125W_100PPM, Mounted=Yes, PackageDescription=Standard, Part Description="General Purpose Thick Film Chip Resistor", Part Number=R0805_22K_1%_0.125W_100PPM, Pin Count=2, SMD=Yes, Socket=No, Status=Preferred, Table="Resistors SMD", TC=±100ppm/°C
R21: library part R0805_91K_1%_0.125W_100PPM, Case=0805, Manufacturer=GENERIC, Manufacturer1 ComponentHeight=0.6mm, Manufacturer1 Example="NIC COMPONENT", Manufacturer1 Part Number=NRC10F9102TRF, Power=0.125W, Tolerance=±1%, Author="CERN DEM JLC", Component Type=Standard, CreateDate=03.12.2007, HelpURL=\\cern.ch\dfs\Applications\Altium\Datasheets\R0805_NIC_NRC.pdf, LatestRevisionDate=13.03.2008, Manufacturer Part Number=R0805_91K_1%_0.125W_100PPM, Mounted=Yes, PackageDescription=Standard, Part Description="General Purpose Thick Film Chip Resistor", Part Number=R0805_91K_1%_0.125W_100PPM, Pin Count=2, SMD=Yes, Socket=No, Status=Preferred, Table="Resistors SMD", TC=±100ppm/°C
R22: library part R0805_100R_1%_0.125W_100PPM, Case=0805, Manufacturer=GENERIC, Manufacturer1 ComponentHeight=0.6mm, Manufacturer1 Example="NIC COMPONENT", Manufacturer1 Part Number=NRC10F4700TRF, Power=0.125W, Tolerance=±1%, Author="CERN DEM JLC", Component Type=Standard, CreateDate=03.12.2007, HelpURL=\\cern.ch\dfs\Applications\Altium\Datasheets\R0805_NIC_NRC.pdf, LatestRevisionDate=13.03.2008, Manufacturer Part Number=R0805_100R_1%_0.125W_100PPM, Mounted=Yes, PackageDescription=Standard, Part Description="General Purpose Thick Film Chip Resistor", Part Number=R0805_100R_1%_0.125W_100PPM, Pin Count=2, SMD=Yes, Socket=No, Status=Preferred, Table="Resistors SMD", TC=±100ppm/°C
R24 R25: library part CMP-1014-00153-1, "2M 0.25W 5% 1206 (3216 Metric)  SMD", Case-EIA=1206, Case-Metric=3216, Power="0.25 W", Tolerance="5 %", Technology=SMT
R28: library part R0805_3K3_1%_0.125W_100PPM, Case=0805, Manufacturer=GENERIC, Manufacturer1 ComponentHeight=0.6mm, Manufacturer1 Example="NIC COMPONENT", Manufacturer1 Part Number=NRC10F3301TRF, Power=0.125W, Tolerance=±1%, Author="CERN DEM JLC", Component Type=Standard, CreateDate=03.12.2007, HelpURL=\\cern.ch\dfs\Applications\Altium\Datasheets\R0805_NIC_NRC.pdf, LatestRevisionDate=13.03.2008, Manufacturer Part Number=R0805_3K3_1%_0.125W_100PPM, Mounted=Yes, PackageDescription=Standard, Part Description="General Purpose Thick Film Chip Resistor", Part Number=R0805_3K3_1%_0.125W_100PPM, Pin Count=2, SMD=Yes, Socket=No, Status=Preferred, Table="Resistors SMD", TC=±100ppm/°C
R31: library part R0805_6K2_1%_0.125W_100PPM, Case=0805, Manufacturer=GENERIC, Manufacturer1 ComponentHeight=0.6mm, Manufacturer1 Example="NIC COMPONENT", Manufacturer1 Part Number=NRC10F6201TRF, Power=0.125W, Tolerance=±1%, Author="CERN DEM JLC", Component Type=Standard, CreateDate=03.12.2007, HelpURL=\\cern.ch\dfs\Applications\Altium\Datasheets\R0805_NIC_NRC.pdf, LatestRevisionDate=13.03.2008, Manufacturer Part Number=R0805_6K2_1%_0.125W_100PPM, Mounted=Yes, PackageDescription=Standard, Part Description="General Purpose Thick Film Chip Resistor", Part Number=R0805_6K2_1%_0.125W_100PPM, Pin Count=2, SMD=Yes, Socket=No, Status=Preferred, Table="Resistors SMD", TC=±100ppm/°C
U1: library part CMP-1643-00001-1, "Zero-Cross Triac Driver Optocoupler (600 Volt Peak), 60 mA, 250 mW, -40 to 85 degC, 6-Pin MDIP 6L-N06C, RoHS, Tube", Forward Current="60 mA", Generic Part Number=MOC3063, Power Dissipation Max="250 mW", Temperature Max="85 degC", Temperature Min="-40 degC", ComponentLink1Description="Manufacturer URL", ComponentLink1URL=http://www.fairchildsemi.com/, ComponentLink2Description=Datasheet, ComponentLink2URL=http://www.fairchildsemi.com/datasheets/MO/MOC3063M.pdf, ComponentLink3Description="Package Specification", ComponentLink3URL=http://www.fairchildsemi.com/package-drawings/N0/N06C.pdf, DatasheetVersion="Rev. 1.5", IR="0.005 uA", Mounting Technology="Surface Mount", PackageDescription="6-Pin Small Outline Package, Body 8.51 x 6.35 mm, Pitch 2.54 mm", Packing=Tube, PartNumber=MOC3063SM, RoHS=TRUE, VF="1.3 V"
U2: library part CMP-1685-00009-1, "Dual Operational Amplifier, 3 to 32 V, 0 to 70 degC, 8-Pin SOIC (D), Green (RoHS & no Sb/Br), Tape and Reel", Code_JEDEC=MS-012, ComponentLink1Description="Manufacturer URL", ComponentLink1URL=http://www.ti.com/, ComponentLink2Description=Datasheet, ComponentLink2URL=http://www.ti.com/lit/ds/symlink/lm358.pdf, ComponentLink3Description="Package Specification", ComponentLink3URL=http://www.ti.com/lit/ml/msoi002j/msoi002j.pdf, DatasheetVersion="SLOS068T, 04/2015", PackageDescription="8-Pin Small Outline Integrated Circuit, Body 4.9 x 3.9 mm, Pitch 1.27 mm", PackageReference=D0008A, PackageVersion="4040047-3/M, 06/2011"
U3: library part CMP-0366-01226-2, "Automotive Catalog Adjustable Precision Shunt Regulator, 34 ppm / degC, 100 mA, -40 to 125 degC, 3-pin SOT-23 (DBZ), Green (RoHS & no Sb/Br)", Manufacturer="Texas Instruments", Rating=Automotive, Temp Coeff(Typ)(ppm/ degree C)=34, Code_JEDEC=TO-236, ComponentLink1Description="Manufacturer URL", ComponentLink1URL=http://www.ti.com/, ComponentLink2Description=Datasheet, ComponentLink2URL=http://www.ti.com/general/docs/lit/getliterature.tsp?genericPartNumber=TL431A-Q1&fileType=pdf, ComponentLink3Description="Package Specification", ComponentLink3URL=http://www.ti.com/litv/pdf/mpds108a, DatasheetVersion=SGLS302C, Eco-Plan="Green (RoHS & no Sb/Br)", Initial Accuracy @ 25/deg C(%)=1, Iout/Iz(Max)(mA)=100, Min Iz for Regulation(uA)=600, Mounting Technology="Surface Mount", PackageDescription="3-Pin Plastic Small Outline, Body 2.92 x 1.3 mm, Pitch 0.95 mm", PackageReference=DBZ0003A, PackageVersion=4203227/B, PartNumber=TL431AQDBZRQ1, SubFamily="Shunt Voltage Reference", VO Adj(Max)(V)=36, VO Adj(Min)(V)=2.495
U4: library part CMP-1685-00007-1, "Precision Timer, 4.5 to 16 V, 0 to 70 degC, 8-Pin SOIC (D8), Green (RoHS & no Sb/Br), Tape and Reel", Case\Package=SMA, Forward Current="1 A", Forward Voltage="450 mV", Max Operating Temperature="125 degC", Max Surge Current="30 A", Min Operating Temperature="-55 degC", Package Quantity=1, Peak Reverse Current="500 uA", Code_JEDEC=MS-012, ComponentLink1Description="Manufacturer URL", ComponentLink1URL=http://www.ti.com/, ComponentLink2Description=Datasheet, ComponentLink2URL=http://www.ti.com/general/docs/lit/getliterature.tsp?genericPartNumber=NE555&fileType=pdf, ComponentLink3Description="Package Specification", ComponentLink3URL=http://www.ti.com/lit/ml/msoi002j/msoi002j.pdf, DatasheetVersion="SLFS022I, 09/2014", Height="2.44 mm", Length="4.57 mm", Mount="Surface Mount", PackageDescription="8-Pin Small Outline Integrated Circuit, Body 4.9 x 3.9 mm, Pitch 1.27 mm", PackageReference=D0008A, PackageVersion="4040047-3/M, 06/2011", Packaging="Cut Tape", Pins=2, Radiation Hardening=No, REACH SVHC=Unknown, RoHSCompliant=true, Width="2.84 mm"
U5: library part CMP-2000-06281-1, "Phototransistor Optocoupler, 4 us Rise, 3 us Fall, 5000 Vrms, -55 to 110 degC, 4-Pin MDIP, RoHS, Tape and Reel", Current - DC Forward (If) (Max)=50mA, Current Transfer Ratio (Max)=600%@5mA, Current Transfer Ratio (Min)=300%@5mA, Manufacturer="Fairchild Semiconductor", Operating Temperature=-55°C~110°C, Package / Case=4-SMD,GullWing, Package Description="4-Pin Surface Mount Device, Body 6.5 x 4.6 mm, Pitch 2.54 mm", Package Reference="MDIP 4L", Package Version=10/2014, Standard Package=1, Supplier Device Package=4-SMD, Voltage - Forward (Vf) (Typ)=1.2V, Voltage - Isolation=5000Vrms, Voltage - Output (Max)=70V, Category=Isolators, Current - Output / Channel=50mA, Datasheet URL=https://www.fairchildsemi.com/datasheets/FO/FOD817D.pdf, Datasheet Version="Rev. 2.8, 11/2015", Family=Optoisolators-Transistor,PhotovoltaicOutput, Input Type=DC, Manufacturer URL=https://www.fairchildsemi.com/, Mounting Technology=SurfaceMount, Mounting Type=SurfaceMount, Number of Channels=1, Online Catalog=FOD617,814,817Series, Other Names=FOD817DSDDKR, Output Type=Transistor, Package URL=https://www.fairchildsemi.com/package-drawings/N0/N04C.pdf, Packaging=Digi-Reel®, Rise / Fall Time (Typ)=4µs,3µs, Series=-, Turn On / Turn Off Time (Typ)=-, Vce Saturation (Max)=200mV
U6: library part CMP-0366-01028-2, "Adjustable Precision Shunt Regulator, 34 ppm / degC, 100 mA, 0 to 70 degC, 3-pin SOT-23 (DBZ), Green (RoHS & no Sb/Br)", Manufacturer="Texas Instruments", Rating=Catalog, Temp Coeff(Typ)(ppm/ degree C)=34, Code_JEDEC=TO-236, ComponentLink1Description="Manufacturer URL", ComponentLink1URL=http://www.ti.com/, ComponentLink2Description=Datasheet, ComponentLink2URL=http://www.ti.com/general/docs/lit/getliterature.tsp?genericPartNumber=TL431A&fileType=pdf, ComponentLink3Description="Package Specification", ComponentLink3URL=http://www.ti.com/litv/pdf/mpds108a, DatasheetVersion=SLVS543M, Eco-Plan="Green (RoHS & no Sb/Br)", Initial Accuracy @ 25/deg C(%)=1, Iout/Iz(Max)(mA)=100, Min Iz for Regulation(uA)=600, Mounting Technology="Surface Mount", PackageDescription="3-Pin Plastic Small Outline, Body 2.92 x 1.3 mm, Pitch 0.95 mm", PackageReference=DBZ0003A, PackageVersion=4203227/B, PartNumber=TL431ACDBZR, SubFamily="Shunt Voltage Reference", VO Adj(Max)(V)=36, VO Adj(Min)(V)=2.495
DA1: Device=TNY279GN, Part Number=TNY279GN, Table=Power
VD1 VD4: Device=10BQ100, Part Number=10BQ100, Table=Diode
VD2: Device=SM6T200CA, Part Number=SM6T200CA, Table=Diode
VD3: Device=US1M, Part Number=US1M, Table=Diode
VD5: PartNumber=DF10S
XP1: Device=KDJ01-8, Part Number=KDJ01-8, Table=OTHER
XS1: PartNumber=DG306-021-12

## Free pads (board coordinates)
  round 3 hole 3: 2(4.5,28) 2(68.5,28) 3(4.5,-28) 3(68.5,-28)
  round 2 hole 1: 4(52.4,-3.2)

## Via types
v1: diameter 2, hole 1, Top Layer to Bottom Layer, tented both sides, 2 vias

## Nets (pads, with @x,y where several pads share a name; then routed paths per layer and width w, separated by ;. In a path a pad name is that pad's centre, name@x,y a point inside that pad or via, vN(x,y) a via of type N, cw(c..) or ccw(c..) an arc to the next point about the centre after c; other vN are vias at no path point)
+24V: C4.2 C5.2 C8.2 C9.2 C10.2 C14.1 R17.1 R23.1 R27.2 VD1.K VD4.K XP1.1 | length 47.1
  Bottom Layer w0.3: XP1.1 XP1.1@17.56,8.14 ; C14.1 25.06,8.2 ; R27.2@27.023,8.155 27.325,8.155 28,8.83 28,10.15 28.4,10.55 31.603,10.55 33.175,12.122 33.175,13.5 34.7,15.025 R23.1
  Bottom Layer w0.4: R17.1@37.314,-3.517 R17.1@37.566,-3.517
  Bottom Layer w0.5: XP1.1@17.56,8.14 17.56,1.814 21.43,-2.056 23.881,-2.056 VD4.K@24.05,-1.887 ; VD4.K@24.4,-2.9 VD4.K@25.079,-3.579 ; 33.732,-4.3 33.932,-4.5 36.331,-4.5 R17.1@37.314,-3.517
  Bottom Layer w0.6: C8.2@27.2,-4.3 33.732,-4.3
  Bottom Layer w0.8: C14.1@22.35,5.55 C14.1@24,7.2 ; VD4.K@25.079,-3.579 26.479,-3.579 C8.2@27.2,-4.3
AC1: D1.2 R8.2 VD5.4 XS1.2 | length 2.8
  Bottom Layer w1: D1.2 68.921,-17.669 69.65,-16.94
AC2: VD5.3 XP1.7 XS1.1
AC24: TR1.8 VD1.A
BP/M: C15.2 DA1.2 | length 5.7
  Bottom Layer w0.3: DA1.2 56.884,14.546 C15.2
DRAIN: DA1.4 TR1.4 VD3.A | length 0
  Bottom Layer w0.5: TR1.4 TR1.4@47.945,16.425
EN/UV: DA1.1 R25.2 U5.4 | length 20
  Bottom Layer w0.5: U5.4 45.45,18.519 45.45,15.267 46.667,14.05 48.89,14.05 49.15,13.79 49.15,11.993 49.893,11.25 52.605,11.25 53.55,12.195 ; R25.2 54.15,11.595 53.55,12.195 ; DA1.1 53.55,13.24 53.55,12.195
FAN-: C8.1 C9.1 C10.1 L1.2 XP1.4 | length 36
  Bottom Layer w0.5: XP1.4 15.3,12.7 16.016,12.7 19.3,9.416 19.3,7.575 18.446,6.721 18.446,2.161 21.607,-1 25.957,-1 26.357,-1.4 C8.1@27.5,-1.4
  Bottom Layer w0.8: C8.1 34,-1.4 L1.2@35.35,-2.75
GND: C1.1 C4.1 C5.1 C6.1 C7.1 C12.2 C13.2 C14.2 C16.1 C17.1 pad.4 Q1.3 R7.2 R13.1 R16.1 R19.1 R28.1 TR1.5 U2.4 U3.3 U4.1 U6.3 XP1.5 XP1.9 XP1.10
  other v1: 27.48,-22.55 20.503,-7.85
HGND: C11.2 C15.1 DA1.5 DA1.6 DA1.7 DA1.8 U5.3 VD5.2
HTR2: C3.1 D1.1 XP1.6 | length 6.6
  Bottom Layer w1: C3.1 69.193,-20.107
HV: C11.1 C17.2 R24.1 TR1.1 VD2.A VD5.1 | length 7.2
  Bottom Layer w0.5: VD2.A@51.5,8.75 VD2.A@51.6,8.85 ; C11.1@65.93,13.78 C11.1@66.45,14.3
  Bottom Layer w1: TR1.1 49.235,6.3 51.5,6.3 51.5,4.9 C17.2@52.05,4.35
NetC2_1: C2.1 DS1.2 R14.2 U2.7 | length 31.4
  Bottom Layer w0.2: 5.3,-20.55 6.9,-22.15
  Bottom Layer w0.3: DS1.2 4.5,-15.4 3.1,-16.8 3.1,-19.4 4.25,-20.55 5.3,-20.55 ; 6.9,-22.15 8.45,-22.15 9.75,-20.85 16.85,-20.85 17.176,-20.524 U2.7 17.176,-15.618 16.758,-15.2 C2.1@12.7,-15.2
NetC2_2: C2.2 R4.1 R32.2 U2.5 | length 13.4
  Bottom Layer w0.3: R4.1@12.675,-11.476 12.7,-11.501 12.7,-13.5 13.8,-13.5 14.193,-13.893 17.959,-13.893 19.716,-15.65 U2.5 R32.2@19.716,-19.141
NetC3_2: C3.2 R8.1 R11.2
NetC12_1: C12.1 R29.2 U4.2 U4.6 | length 76.6
  Bottom Layer w0.2: 2.8,-15.742 2.8,-13.6 3.65,-12.75 6.1,-12.75
  Bottom Layer w0.3: 2.8,-15.742 2.5,-16.042 2.5,-19.676 3.05,-20.226 3.05,-23.45 4.3,-24.7 27.9,-24.7 29.313,-23.287 29.313,-15.064 29.889,-14.488 34.279,-14.488 34.629,-14.838 35.95,-14.838 36.335,-15.223 U4.6 39.677,-15.223 40.947,-13.953 U4.2 C12.1@45.7,-13.953 ; 6.1,-12.75 7.112,-12.75 8.5,-11.362 8.5,-6.75 R29.2
NetC13_1: C13.1 U4.5 | length 2.4
  Bottom Layer w0.3: C13.1@35.35,-16.438 37.72,-16.438 U4.5
NetD1_3: D1.3 U1.4 | length 0.5
  Bottom Layer w0.8: U1.4@59.35,-14.621 U1.4@59.729,-15
NetD4_1: D4.1 R30.1 | length 1.7
  Bottom Layer w0.3: R30.1 10.2,-8.1 10.721,-7.579 D4.1
NetD4_2: D4.2 R29.1 | length 8.5
  Bottom Layer w0.3: R29.1 9.45,-2.75 10.855,-4.155 D4.2
NetD4_3: D4.3 R21.1 U4.7 | length 30.6
  Bottom Layer w0.3: D4.3 13.6,-7.173 13.6,-12.4 14.526,-13.326 24.575,-13.326 25.143,-13.893 R21.1@35.35,-13.893 ; R21.1@35.55,-13.938 35.565,-13.953 U4.7
NetDS1_1: DS1.1 U1.2 | length 68.6
  Bottom Layer w0.3: DS1.1 4.152,-11.5 1.9,-13.752 1.9,-20 2.5,-20.6 2.5,-23.791 3.959,-25.25 45.717,-25.25 47.3,-23.667 47.3,-18.649 48.806,-17.143 U1.2
NetDS2_2: DS2.2 R12.1 | length 11.1
  Bottom Layer w0.3: DS2.2 10.659,3.77 11.825,2.604 R12.1
NetL1_1: L1.1 Q1.4 VD4.A | length 12.1
  Bottom Layer w1: Q1.4@31.051,-11.95 Q1.4@31.459,-11.542
  Bottom Layer w1.5: VD4.A@24.407,-7.7 L1.1@35,-7.7 ; Q1.4@28.087,-8.911 Q1.4@29.046,-8.911
NetQ1_1: Q1.1 R22.2 | length 8.3
  Bottom Layer w0.3: Q1.1 Q1.1@32.266,-16.574 ; Q1.1@32.25,-15.712 33.15,-15.712 34.826,-17.388 36.95,-17.388 37.65,-18.088 R22.2 R22.2@39.45,-18.088
NetR1_1: R1.1 R4.2 U2.1 | length 3.4
  Bottom Layer w0.3: R4.2@14.824,-11.476 U2.1 15.906,-10.687 15.6,-10.381 R1.1@15.6,-9.25
NetR1_2: R1.2 R9.2 U2.2 | length 4
  Bottom Layer w0.3: U2.2 17.176,-9.374 17.3,-9.25 R9.2@17.3,-7.575
NetR2_2: R2.2 U1.1 | length 12.4
  Bottom Layer w0.3: R2.2 51.734,-11.65 52.503,-12.419 52.503,-18.997 51.817,-19.683 U1.1 U1.1@50.332,-19.675
NetR5_1: R5.1 U2.3 | length 8.5
  Bottom Layer w0.3: U2.3 18.446,-10.631 19,-10.077 R5.1@19,-3.25
NetR6_1: R6.1 R15.2 | length 10.3
  Bottom Layer w0.3: R15.2 15.994,-20.25 16.275,-19.969 R6.1 ; R6.1@16.325,-18.95 16.325,-18.6 R6.1@16.35,-18.6
NetR6_2: R6.2 U2.6 | length 2
  Bottom Layer w0.3: R6.2@18.05,-18.6 18.05,-18.004 18.446,-17.608 U2.6
NetR9_1: R9.1 R10.1 R13.2 | length 6.5
  Bottom Layer w0.3: R10.1 16.192,-4.175 17.175,-5.158 R13.2 17.175,-5.617 R9.1
NetR11_1: R11.1 U1.6 | length 10.9
  Bottom Layer w0.8: R11.1 58.75,-11.625 57.5,-12.875 57.5,-19.209 57.974,-19.683 U1.6
NetR14_1: R14.1 R33.1 | length 1.4
  Bottom Layer w0.3: R14.1 R33.1
NetR15_1: R15.1 R31.1 | length 9.8
  Bottom Layer w0.3: R15.1 5,-15.925 6.2,-14.725 6.2,-13.522 6.397,-13.326 7.326,-13.326 9.35,-11.301 R31.1@9.35,-10.338
NetR15_3: R15.3 R16.2 | length 6.8
  Bottom Layer w0.3: R15.3 R16.2@11.825,-22.75
NetR18_1: R18.1 R19.2 U3.2 | length 3.4
  Bottom Layer w0.2: U3.2@43.625,-5.082 R18.1 ; U3.2@43.65,-4.757 U3.2@43.653,-4.755 ; U3.2@43.753,-5.205 R19.2
NetR22_1: R22.1 U4.3 | length 4.6
  Bottom Layer w0.3: R22.1@41.15,-18.088 41.15,-16.138 42.065,-15.223 U4.3
NetR23_2: R23.2 R26.2 U5.1 | length 5.1
  Bottom Layer w0.3: R26.2@33.206,19.525 33.4,19.525 34.35,19.525 35.145,18.73 U5.1 R23.2
NetR24_2: R24.2 R25.1 | length 1.6
  Bottom Layer w0.5: R25.1@57.2,9.871 R24.2@58.8,9.871
NetR26_1: R26.1 U5.2 U6.1 | length 4.9
  Bottom Layer w0.3: U6.1 U5.2@36.35,21.292
NetR27_1: R27.1 R28.2 U6.2 | length 14.5
  Bottom Layer w0.3: R27.1@26.823,9.897 R28.2 ; R28.2@27.023,11.109 31.126,11.109 32.45,12.433 32.45,17.6 31.5,18.55 U6.2
NetR29_3: R29.3 R30.2 | length 3.3
  Bottom Layer w0.3: R29.3 6.332,-7.75 6.682,-8.1 R30.2
NetR32_1: R32.1 R34.2 | length 2.3
  Bottom Layer w0.3: R32.1 21.56,-19.002 R34.2
NetR33_2: R33.2 R34.1 | length 1.6
  Bottom Layer w0.3: R33.2@22.125,-20.75 23.698,-20.75 R34.1
NetVD2_K: VD2.K VD3.K
REED: DS2.1 XP1.8 | length 36.3
  Bottom Layer w0.3: DS2.1 4.17,1.23 2.85,2.55 2.85,4.643 3.557,5.35 7.95,5.35 8.7,6.1 8.7,11.15 8.95,11.4 12.437,11.4 13.6,12.563 13.6,13.325 13.225,13.7 11.28,13.7 10.225,14.755 10.225,16.775 11.25,17.8 13.154,17.8 15.204,15.75 XP1.8
TC+: C1.2 R3.1 R5.2 XP1.3 | length 20.1
  Bottom Layer w0.3: C1.2@9.55,10.45 9.85,10.75 XP1.3 14.8,10.7 14.8,7.95 16.9,5.85 R3.1 17.92,-0.675 18.795,-1.55 R5.2@19,-1.55
TC-: R7.1 XP1.2 | length 2.7
  Bottom Layer w0.3: R7.1@9.55,8.25 XP1.2
VDD: C6.2 C7.2 C16.2 R2.1 R3.2 R10.2 R12.2 R17.2 R18.2 R21.2 R31.2 U2.8 U3.1 U4.4 U4.8 | length 86.2
  Bottom Layer w0.4: R31.2@11.1,-10.56 11.1,-9.025 11.7,-8.425 R12.2@11.7,-2.65 ; R31.2 11.125,-11.825 10.2,-12.75 10.2,-16.05 10.876,-16.726 U2.8 ; R12.2@11.95,-2.4 20.55,-2.4 21.012,-2.862 22.03,-2.862 22.68,-3.512 22.68,-4.28 23.016,-4.616 26.05,-4.616 26.641,-5.206 R17.2@37.684,-5.206 ; R21.2 35.55,-12.238 36.4,-12.238 36.845,-12.683 U4.8 R17.2@37.775,-5.325 ; R17.2 41.832,-5.19 U3.1 R18.2@41.85,-3.607 ; C7.2 39.85,-7.9 41.179,-9.229 46.922,-9.229 47.75,-10.057 47.75,-15.156 46.394,-16.513 43.445,-16.513 U4.4 43.424,-16.494 C6.2 ; U3.1@41.75,-4.998 U3.1@41.75,-4.757
pads on no net: DA1.3 TR1.6 TR1.7 U1.3 U1.5 VD1.0 VD4.0

## Polygon pours and split planes (outlines as drawn)
GND on Bottom Layer "Bottom Layer-GND" (solid, remove dead copper, pour order 0): 0,31 7.9,31 7.9,22.748 9.598,21.05 20.65,21.05 22.6,23 38.9,23 38.9,4.6 43.65,-0.15 53.108,-0.15 53.9,-0.942 53.9,-31 0,-31
no net on Bottom Layer "Bottom Layer-No Net" (solid, pour order 4): 0,31 72.5,31 72.5,-31 0,-31
GND on Top Layer "Top Layer-GND" (solid, remove dead copper, pour order 2): -3.8,31.15 9.15,31.15 9.35,30.95 9.35,19.3 9.85,18.8 20.15,18.8 24.45,23.1 36.1,23.1 38.7,20.5 38.7,6.45 44.8,0.35 51.85,0.35 53.95,-1.75 53.95,-33.2 -3.8,-32.85

## Keep-outs
Keep-Out Layer:
  the board outline again, w0.1

## Other copper
Bottom Layer:
  region net +24V: 27.517,8.35 22.181,8.35 20.696,6.865 20.696,1.055 22.226,-0.475 35.441,-0.475 37.1,-2.134 37.1,-3.8 38.271,-3.8 38.271,1.079 38.173,1.177 24.9,1.177 24.9,4.574 27.517,7.19
  region net NetR24_2: 56.25,10.788 59.122,10.788 59.175,10.735 59.175,8.742 59,8.567 56.262,8.567 56.125,8.704 56.125,10.667
  region net NetVD2_K: 52.766,16.9 49.9,16.9 49.9,12.563 50.221,12.241 52.414,12.241 52.766,12.593
  region net HTR2: 69.206,-19.1 64.069,-19.1 63.55,-18.581 61.669,-18.581 61.157,-19.092 61.157,-21.557 61.55,-21.95 70.934,-21.95 72.2,-20.684 72.2,20.426 63.126,29.5 11.942,29.5 10.6,28.158 10.6,22.289 11.339,21.55 12.85,21.55 15.15,23.85 15.15,24.126 18.524,27.5 63.323,27.5 71.1,19.723 71.1,-17.206
  region net NetD1_3: 68.657,-13.15 66.056,-13.15 63.607,-15.599 61.699,-15.599 60.7,-14.6 59.36,-14.603 59.36,-15.44 59.35,-15.45 60.38,-15.45 61.157,-16.227 68.146,-16.227 68.657,-15.716
  region net AC1: 62.315,4 64.95,4 64.95,-1.35 66.15,-2.55 70.25,-2.55 70.7,-3 70.7,-17.039 68.939,-18.8 66.03,-18.8 65.58,-18.35 65.58,-16.923 65.952,-16.55 68.7,-16.55 69.039,-16.211 69.039,-12.4 66.35,-12.4 66.35,-9.25 62.315,-5.215
  region net AC2: 69.7,6.985 65.542,2.827 65.542,-1.292 66.4,-2.15 70.25,-2.15 70.7,-1.7 70.7,19.45 63.2,26.95 18.676,26.95 15.65,23.924 15.65,22.552 16.577,21.625 17.975,21.625 21.1,24.75 63,24.75 69.7,18.05
  region net AC24: 30.987,6.248 27.429,6.25 25.496,4.317 25.496,1.674 25.67,1.5 29.7,1.5 31.8,3.6 31.8,5.436
  region net NetC3_2: 65.671,-9.4 61.2,-9.4 61,-9.6 61,-14.211 61.75,-14.96 63.49,-14.96 64.05,-14.4 65.85,-12.6 65.85,-9.589
  region net DRAIN: 49.55,23.1 46.3,19.85 46.3,15.5 46.95,14.85 49.1,14.85 49.55,15.3 49.55,18.03 50.25,18.73 52.766,18.73 52.766,20.7 55.844,20.7 55.844,23.1
  region net HV: 49.577,9.897 46.134,6.454 46.134,3.916 46.85,3.2 59.905,3.2 67,10.295 67,12.12 67.83,12.95 67.83,15.57 67.6,15.8 65.2,15.8 65,15.6 65,13.682 62.117,10.8 60.6,10.8 60.6,8.147 52.586,8.147 52.586,9.717 52.405,9.897
  region net HGND: 42.4,19.834 45.884,19.834 49.45,23.4 56.5,23.4 58.05,21.85 58.05,11.3 62.023,11.3 64.45,13.727 64.45,15.8 65.07,16.42 67.83,16.42 68.25,16 68.25,12.7 67.415,11.865 67.415,8 69.35,8 69.35,17.6 62.775,24.175 43.175,24.175 42.4,23.4

## Text inside footprints (layer, text, board x,y; h text height)
C11: Top Overlay "+" at 65.72,11.82 h1.5 r270
C14: Top Overlay "+" at 22.86,4.15 h1.5 r270